# Altium PCB Thermometer.PcbDoc
Units mil, origin at the board's own origin, x right, y up, seen from the top; angles counter-clockwise.
Board outline 618 x 1510 mil, 2 copper layers (Top Layer, Bottom Layer); 27 components, 21 nets, 89 pads, 21 vias.
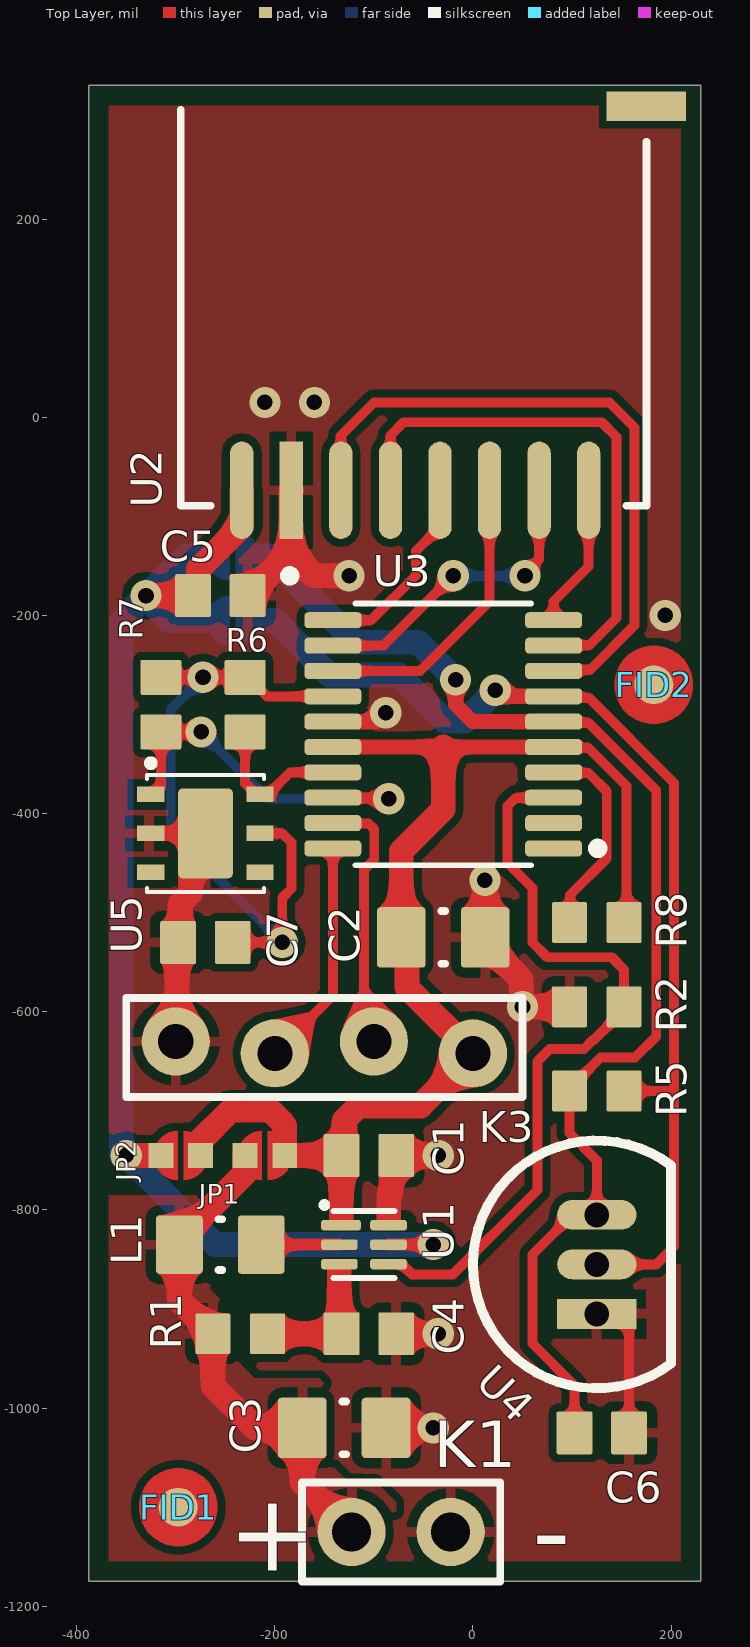
[diagram p0: Top Layer view]
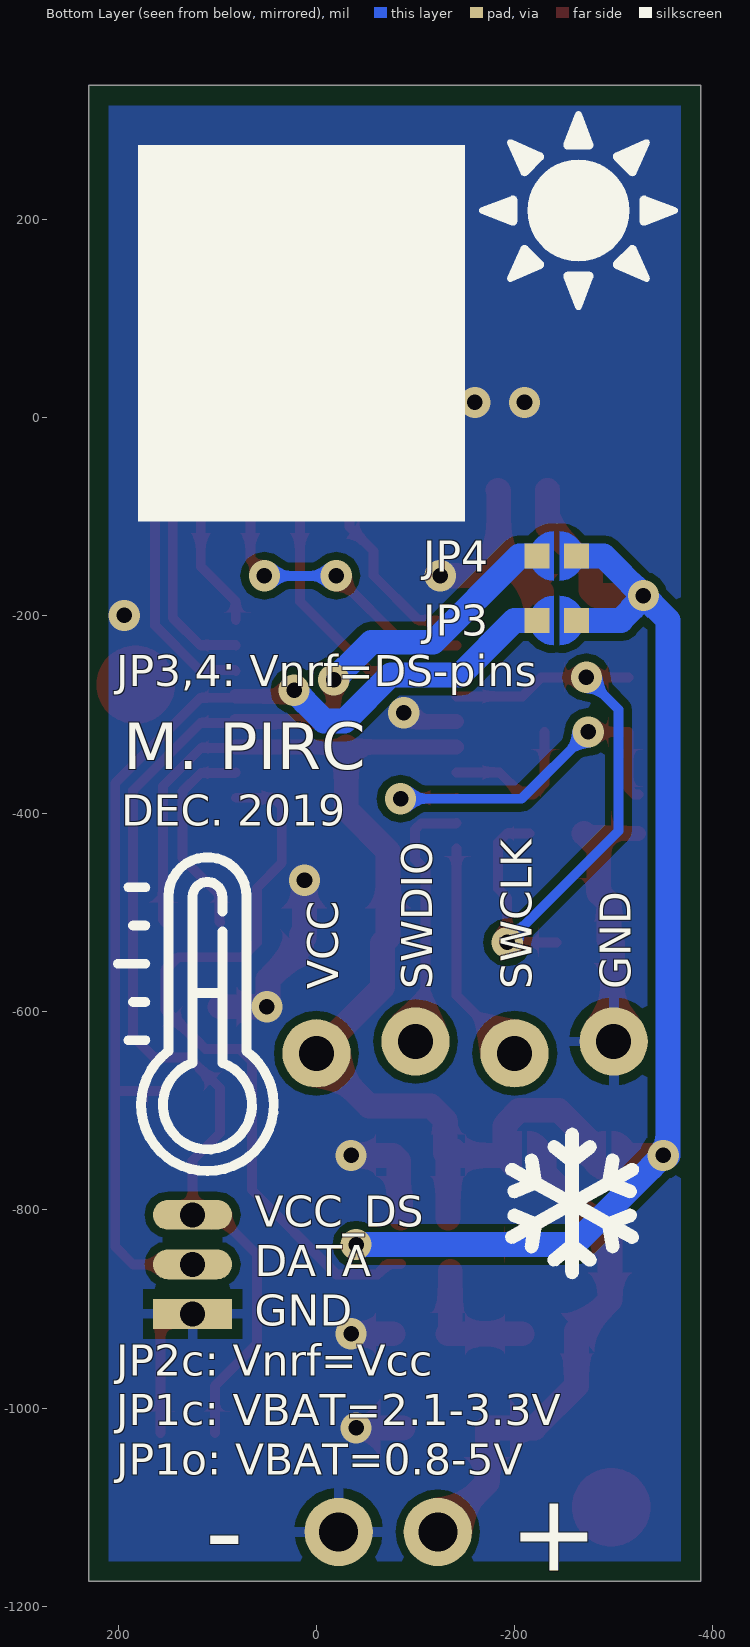
[diagram p1: Bottom Layer view, seen from below]

## Layer stack, top to bottom
Top Solder: solder mask 0.4, Solder Resist, Dk 3.5
Top Layer: signal copper 1.4
Dielectric 1: dielectric 12.6, FR-4, Dk 4.8
Bottom Layer: signal copper 1.4
Bottom Solder: solder mask 0.4, Solder Resist, Dk 3.5

## Board outline
-388,-1175 -388,335 230,335 230,-1175

## Design rules (kind name [scope] priority, off if disabled: settings)
BoardOutlineClearance [All] p1: gap=20 ignorepadtopadclearanceinfootprint=FALSE
Clearance Clearance_SJ [InComponent('JP1') or InComponent('JP2') or InComponent('JP3') or InComponent('JP4') vs InComponent('JP1') or InComponent('JP2') or InComponent('JP3') or InComponent('JP4')] p1: gap=6 ignorepadtopadclearanceinfootprint=TRUE
Clearance Clearance_WOS [HasFootprint('WSON6M')] p2: gap=8 ignorepadtopadclearanceinfootprint=TRUE
Clearance [All] p3: gap=8 ignorepadtopadclearanceinfootprint=TRUE
MinimumSolderMaskSliver [All] p1: minsoldermaskwidth=6
PolygonConnect [All] p1: thpad.connectstyle=Relief thpad.reliefconductorwidth=10 thpad.reliefentries=4 thpad.polygonreliefangle="90 Angle" thpad.airgapwidth=10 smdpad.connectstyle=Relief smdpad.reliefconductorwidth=10 smdpad.reliefentries=4 smdpad.polygonreliefangle="90 Angle" smdpad.airgapwidth=10 via.connectstyle=Direct via.reliefconductorwidth=10 via.reliefentries=4 via.polygonreliefangle="90 Angle" via.airgapwidth=10
RoutingVias [All] p1: holewidth=15.75 width=31.5 viastyle="Through Hole" minholewidth=15.75 minwidth=31.5 maxholewidth=15.75 maxwidth=31.5
SilkToSilkClearance [All] p1: silktosilkclearance=6
SilkToSolderMaskClearance [IsPad] p1: minsilkscreentomaskgap=6 clearancetoexposedcopper=TRUE
SolderMaskExpansion [All] p1: expansion=4 istentingtop=FALSE
Width [All] p1: maxlimit=25 minlimit=10 preferedwidth=10
27 further rules are at their usual default settings.

## Components (designator, comment, footprint, x,y, rotation, side; value= is the part's Value field where it differs from the comment)
C1 "100nF" C1608_0603I_M -105,-745 r0 top
C2 "10uF" C2012_0805I_M -30,-525 r0 top
C3 "10u" C2012_0805I_M -130,-1020 r0 top
C4 "100nF" C1608_0603I_M -105,-925 r0 top
C5 "100nF" C1608_0603I_M -255,-180 r0 top
C6 "100nF" C1608_0603I_M 130,-1025 r0 top
C7 "100nF" C1608_0603I_M -270,-530 r180 top
FID1 "Fiducial" Fiducial -297.5,-1100 r90 top
FID2 "Fiducial" Fiducial 182.5,-270 r90 top
JP1 "JMP" solderJumper -210,-745 r0 top value={Value}
JP2 "JMP" solderJumper -295,-745 r0 top value={Value}
JP3 "JMP" solderJumper -242.5,-205 r0 bottom value={Value}
JP4 "JMP" solderJumper -242.5,-140 r0 bottom value={Value}
K1 "H1x2" H1x2 -122.5,-1125 r180 top
K3 "H1x4" H1x4 0,-636 r0 top
L1 "2.2uH" R2012_0805I_M -255,-835 r0 top
R1 "300" R1608_0603I_M -235,-925 r0 top
R2 "10MEG" R1608_0603I_M 125,-595 r180 top
R5 "10k" R1608_0603I_M 125,-680 r0 top
R6 "10k" R1608_0603I_M -230,-290 r270 top
R7 "10k" R1608_0603I_M -315,-290 r270 top
R8 "10k" R1608_0603I_M 125,-510 r180 top
U1 "TPS610982DSE" WSON6M -110,-835 r270 top
U2 "NRF24L01+" NRF24L01+smd_module -60,265 r90 top
U3 "STM32L011F4P6" TSSOPM -30,-320 r90 top
U4 "DS18B20" TO92 125,-805 r0 top
U5 "SHT2x" DFN6 -325.12,-380.63 r0 top

## Footprints (in the part's own frame and the unit in brackets; to place one, negate y for a bottom-side part, rotate by r counter-clockwise, add the part's x,y. Pads: shape width x height; smd on the part's side, far side on the other; paste and mask are expansions set on the pad)
C1608_0603I_M [mm] "Chip Capacitor, 2-Leads, Body 1.57x0.85mm, IPC Low Density"
  rrect10% 0.92x1.1 smd: 1(-0.7,0) 2(0.7,0)
  body extent -0.83,-0.47 0.83,0.48, height 0.95
C2012_0805I_M [mm] "Chip Capacitor, 2-Leads, Body 2.05x1.25mm, IPC Low Density"
  rrect15% 1.25x1.55 smd: 1(-1.075,0) 2(1.075,0)
  silkscreen extent -0.05,-0.68 0.05,0.67, body extent -1.1,-0.7 1.1,0.7, height 1.4
DFN6 [mm]
  rrect15% 1.4x2.3 smd: 0(1.4,-1)
  rect 0.7x0.4 smd: 1(0,0) 2(0,-1) 3(0,-2) 4(2.8,-2) 5(2.8,-1) 6(2.8,0)
  silkscreen extent -0.1,-2.5 2.9,0.85, body extent -0.11,-2.5 2.91,0.5, height 1.1
Fiducial [mm]
  round 1 smd paste-2 mask+0.5: F(0,0)
  Top Layer region: 0,-1 -0.098,-1 -0.292,-0.962 -0.474,-0.886 -0.637,-0.777 -0.777,-0.637 -0.886,-0.474 -0.962,-0.292 -1,-0.098 -1,0 -1,0.098 -0.962,0.292 -0.886,0.474 -0.777,0.637 -0.637,0.777 -0.474,0.886 -0.292,0.962 -0.098,1 0,1 0.098,1 0.292,0.962 0.474,0.886 0.637,0.777 0.777,0.637 0.886,0.474 0.962,0.292 1,0.098 1,0 1,-0.098 0.962,-0.292 0.886,-0.474 0.777,-0.637 0.637,-0.777 0.474,-0.886 0.292,-0.962 0.098,-1 0,-1
H1x2 [mm]
  round 1.75 hole 1: 1(0,0) 2(-2.54,0)
  silkscreen extent -3.81,-1.27 1.27,1.27, body extent -3.81,-1.27 1.27,1.27, height 8.4
H1x4 [mm]
  round 1.75 hole 0.9: 1(0,-0.152) 2(-2.54,0.152) 3(-5.08,-0.152) 4(-7.62,0.152)
  silkscreen extent -8.89,-1.27 1.27,1.27, body extent -8.89,-1.27 1.27,1.27, height 8.4
NRF24L01+smd_module [mm]
  rect 2.5x0.6 smd: 1(-8.6,3.131)
  oval 2.5x0.6 smd: 2(-8.6,4.401) 3(-8.6,1.861) 4(-8.6,0.591) 5(-8.6,-0.679) 6(-8.6,-1.949) 7(-8.6,-3.219) 8(-8.6,-4.489)
  rect 0.762x2.032 smd: 9(1.245,-5.969)
  silkscreen extent -10.92,-5.97 1.14,5.97, body extent -9,-6 9,6, height 0.8
R1608_0603I_M [mm] "Chip Resistor, 2-Leads, Body 1.57x0.85mm, IPC Low Density"
  rrect10% 0.9x1.05 smd: 1(-0.7,0) 2(0.7,0)
  body extent -0.83,-0.47 0.83,0.48, height 0.5
R2012_0805I_M [mm] "Chip Resistor, 2-Leads, Body 2.05x1.25mm, IPC Low Density"
  rrect15% 1.2x1.5 smd: 1(-1.05,0) 2(1.05,0)
  silkscreen extent -0.05,-0.65 0.05,0.65, body extent -1.1,-0.7 1.1,0.7, height 0.8
solderJumper [mil]
  rect 25x25 smd: 1(20,0) 2(-20,0)
  Top Layer region: -3,25 -15.29,21.49 -24.24,12.36 -27.51,0 -27.51,0 -24.24,-12.36 -15.29,-21.49 -3,-25 -3,-25
  Top Layer region: 3,25 15.29,21.49 24.24,12.36 27.51,0 27.51,0 24.24,-12.36 15.29,-21.49 3,-25 3,-25
TO92 [mil]
  rect 80x30 hole 25: 1(0,-100)
  oval 80x30 hole 25: 2(0,-50) 3(0,0)
  silkscreen extent -125,-175 75,75, body extent -122,-172 67,72, height 205
TSSOPM [mm] "Small Outline Pkg (SOP), 0.65 mm pitch; 20 pin, 6.50 mm L X 4.40 mm W X 1.20 mm H body"
  rrect49% 0.41x1.46 smd: 1(-2.925,-2.83) 2(-2.275,-2.83) 3(-1.625,-2.83) 4(-0.975,-2.83) 5(-0.325,-2.83) 6(0.325,-2.83) 7(0.975,-2.83) 8(1.625,-2.83) 9(2.275,-2.83) 10(2.925,-2.83) 11(2.925,2.83) 12(2.275,2.83) 13(1.625,2.83) 14(0.975,2.83) 15(0.325,2.83) 16(-0.325,2.83) 17(-0.975,2.83) 18(-1.625,2.83) 19(-2.275,2.83) 20(-2.925,2.83)
  silkscreen extent -3.35,-4.09 3.35,2.25, body extent -3.25,-3.2 3.25,3.2, height 1.2
WSON6M [mm] "Small Outline No-Lead (SON), 0.50 mm pitch; 6 pin, 1.50 mm L X 1.50 mm W X 0.80 mm H body"
  rrect52% 0.27x1.02 smd: 1(-0.5,-0.59)
  rrect52% 0.27x0.94 smd: 2(0,-0.63) 3(0.5,-0.63) 4(0.5,0.63) 5(0,0.63) 6(-0.5,0.63)
  silkscreen extent -1.07,-1.07 0.86,0.78, body extent -0.75,-0.8 0.75,0.8, height 0.8

## Part data
C1 C2 C3 C4 C5 C6 C7: library part C, "Capacitor"
FID1 FID2: "according to IPC-7351 - is a 1mm diameter round dot with 2mm solder mask opening", max.Temperature=+125, min.Temperature=-40, Tolerance=5%, Voltage=50V
K1: "Header 1x2 (male)"
K3: "Header 1x4 (male)"
L1: library part L, "L", Supplier Part Number 1=1869751, Supplier 1=Farnell
R1 R2 R5 R6 R7 R8: library part R, "R"
U1: Supplier Part Number 1=2498499, Supplier 1=Farnell
U2: "2.4GHz low power, long range module"
U4: "Temperature sensor 1-wire interface"
U5: max.Temperature=+125, min.Temperature=-40, Tolerance=5%, Voltage=50V

## Via types
v1: diameter 31.5, hole 15.75, Top Layer to Bottom Layer, tented both sides, 21 vias

## Nets (pads, with @x,y where several pads share a name; then routed paths per layer and width w, separated by ;. In a path a pad name is that pad's centre, name@x,y a point inside that pad or via, vN(x,y) a via of type N, cw(c..) or ccw(c..) an arc to the next point about the centre after c; other vN are vias at no path point)
CE: U2.3 U3.8 | length 676.2
  Top Layer w10: U2.3 -133.27,-18.27 -100,15 137.73,15 163,-10.27 163,-209.96 117.96,-255 82.44,-255 U3.8
CS: U2.4 U3.9 | length 552.9
  Top Layer w10: U2.4 -83.27,-18.27 -70,-5 130,-5 145,-20 145,-202.5 117.5,-230 81.85,-230 U3.9
GND: C1.2 C2.2 C3.2 C4.2 C5.2 C6.2 C7.2 K1.2 K3.4 R2.2 U1.6 U2.1 U3.15 U4.1 U5.0 U5.2 | length 1074.3
  Top Layer w10: U4.1 146.56,-905 157.56,-916 C6.2
  Top Layer w15: U5.2 U5.0 ; U3.15 -97.2,-307.2 v1(-88.13,-298.13)
  Top Layer w25: K3.4 -298.78,-628.78 -298.78,-531.22 C7.2 -295.41,-527.85 -295.41,-490.41 -285.06,-480.06 -285.06,-435.06 U5.0 ; C5.2 -227.44,-176.46 -221.83,-170.85 -218.29,-170.85 -183.96,-136.52 ; U2.1 -183.96,-74.27 -183.96,-136.52 ; v1(-125,-160) -160.49,-160 -183.96,-136.52 ; C3.2 v1(-40,-1020) ; -85,-808.13 -85,-785 -83.05,-783.05 -83.05,-750.61 C1.2 v1(-35,-745) ; C4.2 v1(-35,-925) ; v1(12,-467.25) 12.16,-467.41 12.16,-519.48 15,-522.32 C2.2 15,-527.68 15,-533.58 48.76,-567.34 48.76,-593.76 v1(50,-595) R2.2
  Bottom Layer w15: v1(-88.13,-298.13) v1@-85,-295
  Bottom Layer w25: v1(12,-467.25) v1@12,-465.49
  other v1: 194,-200 -210,15 -160,15
IRQ: U2.8 U3.10 | length 145.9
  Top Layer w10: U3.10 81.42,-186.08 116.72,-150.78 U2.8
MISO: U2.7 U3.12 | length 315.4
  Top Layer w10: U3.12 -90.43,-230.43 v1(-20,-160) ; v1(52.5,-160) 52.5,-157.62 66.72,-143.39 U2.7
  Bottom Layer w10: v1(-20,-160) v1(52.5,-160)
MOSI: U2.6 U3.13 | length 299.4
  Top Layer w10: U3.13 -53.52,-256.02 16.72,-185.78 U2.6
NetJP3_1: JP3.1 R5.2 U3.7 U4.2 | length 1122.9
  Top Layer w10: U3.7 82.92,-283.12 116.99,-283.12 203,-369.13 203,-837 185,-855 U4.2 ; R5.2 202.5,-680
  Top Layer w15: v1(22.5,-275.48) 26.96,-275.48 33.1,-281.61 U3.7
  Bottom Layer w25: JP3.1 -200,-205 -145,-260 -75,-260 -28.47,-306.53 -7.76,-306.53 22.5,-276.26 v1(22.5,-275.48)
nRST: R8.2 U3.4 | length 209.6
  Top Layer w10: U3.4 82.04,-359.01 116.51,-359.01 135,-377.5 135,-445 97.98,-482.02 97.98,-509.46 R8.2
PMODE: R2.1 U1.4 U3.3 | length 771
  Top Layer w10: U1.4 -72.01,-854.68 -61.69,-865 -20,-865 65,-780 65,-650 77.56,-637.44 112.1,-637.44 121.21,-628.33 122.18,-628.33 152.56,-597.95 R2.1 152.56,-557.56 140,-545 75,-545 60,-530 60,-475 35,-450 35,-392.5 43.52,-383.98 U3.3
SCK: U2.5 U3.11 | length 198.7
  Top Layer w10: U3.11 -102.75,-204.84 -57.5,-159.59 -57.5,-135 -33.28,-110.78 U2.5
SCL: R6.2 U3.17 U5.6 | length 154.3
  Top Layer w10: R6.2 -230,-369.45 -218.82,-380.63 U5.6 -212.01,-377.76 -204.13,-377.76 -184.76,-358.39 U3.17
SDA: R7.2 U3.18 U5.1 | length 385.5
  Top Layer w10: U5.1 -321.18,-380.63 -315,-374.45 R7.2 v1(-274.42,-317.56) ; U3.18 -140.91,-384.49 -85.51,-384.49 v1(-85,-385)
  Bottom Layer w10: v1(-274.42,-317.56) -272.44,-317.56 -272.44,-319.54 -206.98,-385 v1(-85,-385)
SW: L1.2 U1.2 | length 78.9
  Top Layer w12: L1.2 U1.2
SWCLK: K3.3 U3.20 | length 231.1
  Top Layer w10: K3.3 -141.42,-583.42 U3.20
SWDIO: K3.2 U3.19 | length 266.9
  Top Layer w10: U3.19 -140.98,-410 -105.54,-410 -99.68,-415.86 -99.68,-446.3 -110,-456.62 -110,-620 K3.2
VBAT: C3.1 JP1.2 K1.1 L1.1 R1.1 | length 509.1
  Top Layer w25: JP1.2 -230,-762.76 -296.34,-829.09 L1.1 -296.34,-891.22 -270.73,-916.83 -267.78,-916.83 -262.56,-922.05 R1.1 -262.56,-977.44 -220,-1020 C3.1 -172.32,-1075.18 K1.1
VCC: C1.1 C2.1 JP1.1 JP2.1 K3.1 R8.1 U1.1 U3.5 U3.16 | length 1281.7
  Top Layer w10: U3.5 82.33,-333.71 116.67,-333.71 155,-372.04 155,-507.56 R8.1
  Top Layer w15: U3.16 -30,-332.8 U3.5
  Top Layer w25: JP2.1 -275,-730 -244.5,-699.5 -204.51,-699.5 -192.5,-711.51 -192.5,-712.5 -190,-715 JP1.1 C1.1 ; C1.1@-138.17,-739.39 C1.1 ; -132.89,-808.13 -132.89,-745.33 C1.1 ; -30,-332.8 -30,-395.58 -72.32,-437.91 C2.1 -66.67,-530.66 -66.67,-575.33 K3.1 ; K3.1@0.47,-642.47 K3.1 ; C1.1 -130,-742.44 -130,-709.64 -115.36,-695 -53,-695 K3.1
VCC_DS: C6.1 JP4.1 R5.1 U3.6 U4.3 | length 1296.2
  Top Layer w10: U3.6 82.63,-308.41 116.83,-308.41 185,-376.59 185,-625 163.67,-646.33 128.67,-646.33 110.67,-664.33 110.16,-664.33 97.44,-677.05 R5.1 97.44,-722.44 125,-750 U4.3 100,-805 60,-845 60,-935 102.44,-977.44 C6.1
  Top Layer w15: v1(-17.5,-265) -17.5,-290 -0.3,-307.2 U3.6
  Bottom Layer w25: JP4.1 -205,-140 -118,-227 -55.5,-227 v1(-17.5,-265)
VCC_NRF24: C5.1 JP2.2 JP3.2 JP4.2 U1.5 U2.2 | length 1340.5
  Top Layer w12: U1.5 v1(-40,-835)
  Top Layer w25: v1(-350,-745) JP2.2 ; v1(-330,-180) C5.1 -276.95,-174.39 -276.95,-153.28 -233.28,-109.61 U2.2
  Bottom Layer w25: v1@-354.95,-745 -354.95,-204.95 v1(-330,-180) ; v1(-350,-745) -260,-835 v1(-40,-835) ; JP3.2 -307.5,-205 -307.5,-204.26 -330,-181.76 v1(-330,-180) ; JP4.2 -290,-140 v1(-330,-180)
VCC_SHT: C7.1 R6.1 R7.1 U3.14 U5.5 | length 699.2
  Top Layer w10: R7.1 v1(-272.5,-262.44) R6.1 -227.05,-262.44 -207.87,-281.61 U3.14 ; C7.1 v1(-192.5,-530) -192.5,-485 -183.16,-475.66 -183.16,-429.34 -192.5,-420 U5.5
  Bottom Layer w10: v1(-272.5,-262.44) -305,-294.94 -305,-417.5 v1(-192.5,-530)
VIN: C4.1 R1.2 U1.3 | length 139
  Top Layer w25: R1.2 C4.1 -135,-922.56 -135,-861.87
pads on no net: FID1.F FID2.F U2.9 U3.1 U3.2 U5.3 U5.4

## Polygon pours and split planes (outlines as drawn)
GND on Top Layer "GND-TOP" (solid, remove dead copper, pour order 3): -375,-1175 230,-1175 230,335 -375,335
VBAT on Top Layer "VBAT-TOP" (solid, pour order 0): -375,-1175 -77.5,-1175 -77.5,-1095 -97.36,-1075.14 -126.25,-1073.75 -140,-1060 -140,-985 -155,-970 -220,-970 -240,-950 -240,-905 -265,-880 -265,-800 -280,-785 -375,-785
GND on Bottom Layer "GND-BOT" (solid, remove dead copper, pour order 1): -375,-1175 230,-1175 230,335 -375,335
no net on Bottom Paste "GND-TOP" (solid): -72.49,-0.18 cw(c-0.93,-0.25) -44.15,56.79 -44.15,210.44 cw(c-1.02,210.39) -1.07,253.52 cw(c-1.12,210.39) 42.01,210.44 42.01,56.79 cw(c-1.2,-0.25) 70.35,-0.18 cw(c-1.15,-0.1) -1.07,-71.6 cw(c-0.99,-0.1)

## Silkscreen, mask and mechanical layers (free items; w line width, h text height)
Top Overlay:
  text "-" at 59.75,-1162.61 h78.74
  text "+" at -247.25,-1164.37 h78.74
Bottom Overlay:
  drawing of 26 lines, arcs and shapes, not listed
  text "JP3,4: Vnrf=DS-pins" at 202.13,-271.63 h31.5
  text "M. PIRC" at 195,-355 h47.24
  text "DEC. 2019" at 197.13,-412.13 h31.5
  text "GND" at -317.13,-577.13 h31.5 r270
  text "SWCLK" at -217.13,-577.13 h31.5 r270
  text "SWDIO" at -117.13,-577.13 h31.5 r270
  text "VCC" at -22.13,-577.13 h31.5 r270
  text "VCC_DS" at 62.13,-816.88 h31.5
  text "DATA" at 62.13,-867.13 h31.5
  text "GND" at 62.13,-917.13 h31.5
  text "JP2c: Vnrf=Vcc" at 202.13,-967.13 h31.5
  text "JP1c: VBAT=2.1-3.3V" at 202.13,-1017.13 h31.5
  text "JP1o: VBAT=0.8-5V" at 202.13,-1067.13 h31.5
  text "-" at 112.22,-1162.61 h78.74
  text "+" at -194.78,-1164.37 h78.74
Board Outline:
  the board outline again, w10